# EAGLE board io_board_multi (EAGLE 7.2.0)
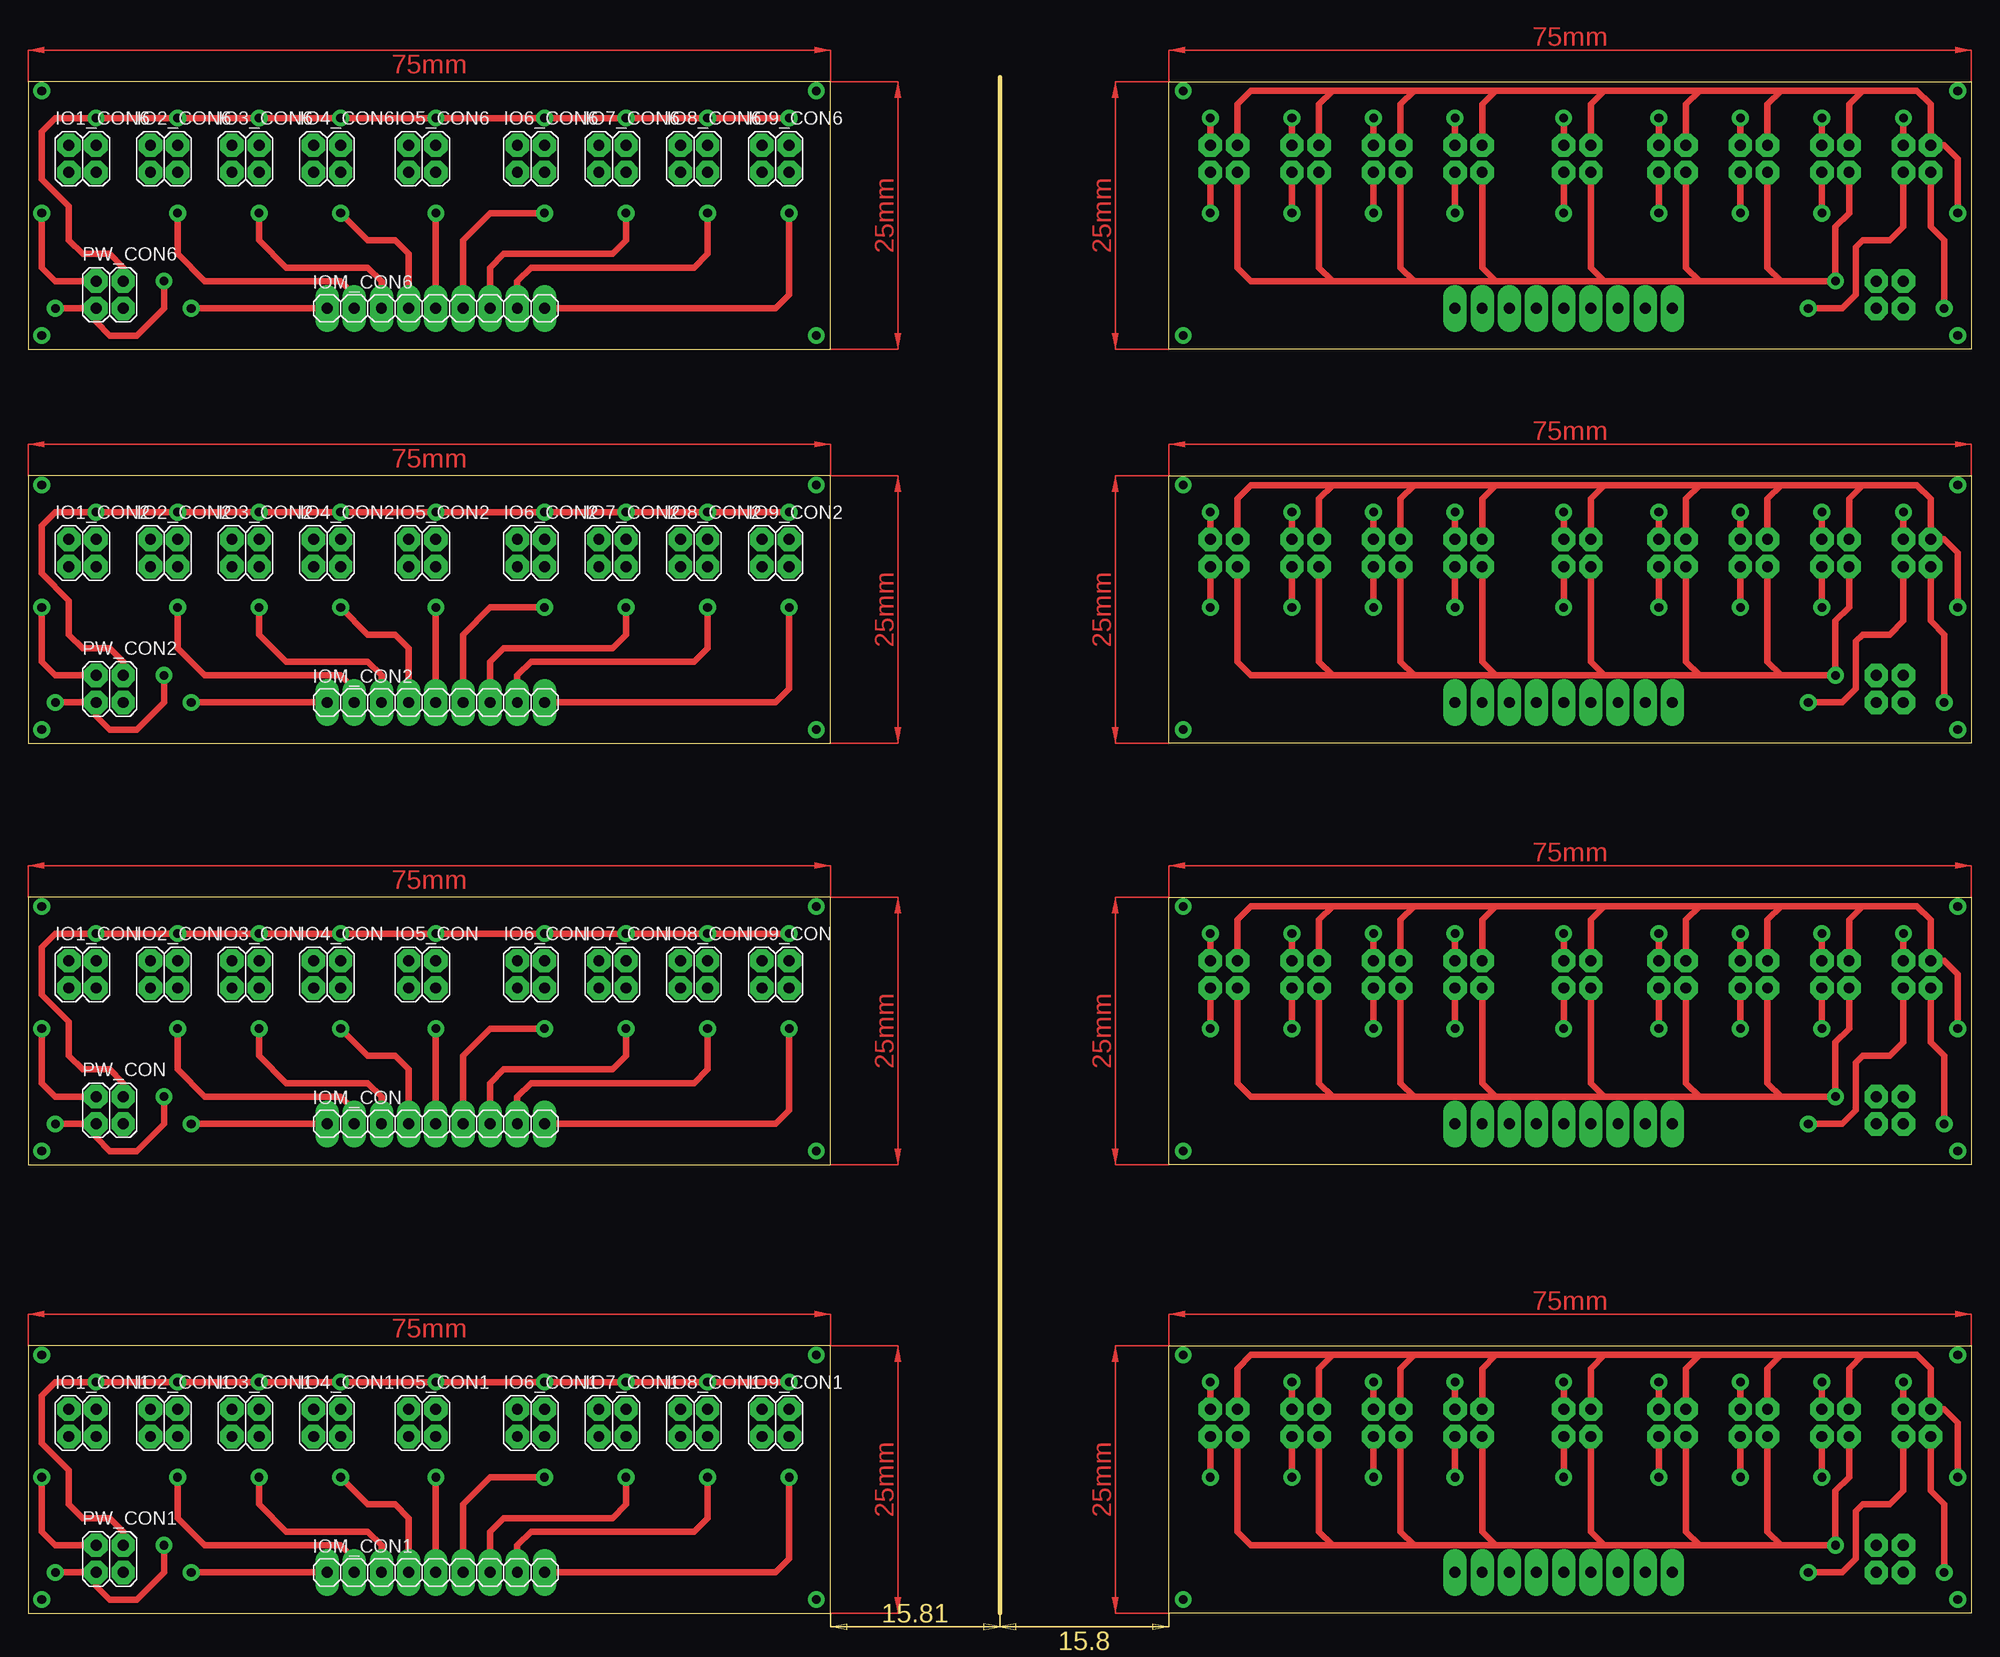
[diagram p0: board, top side]
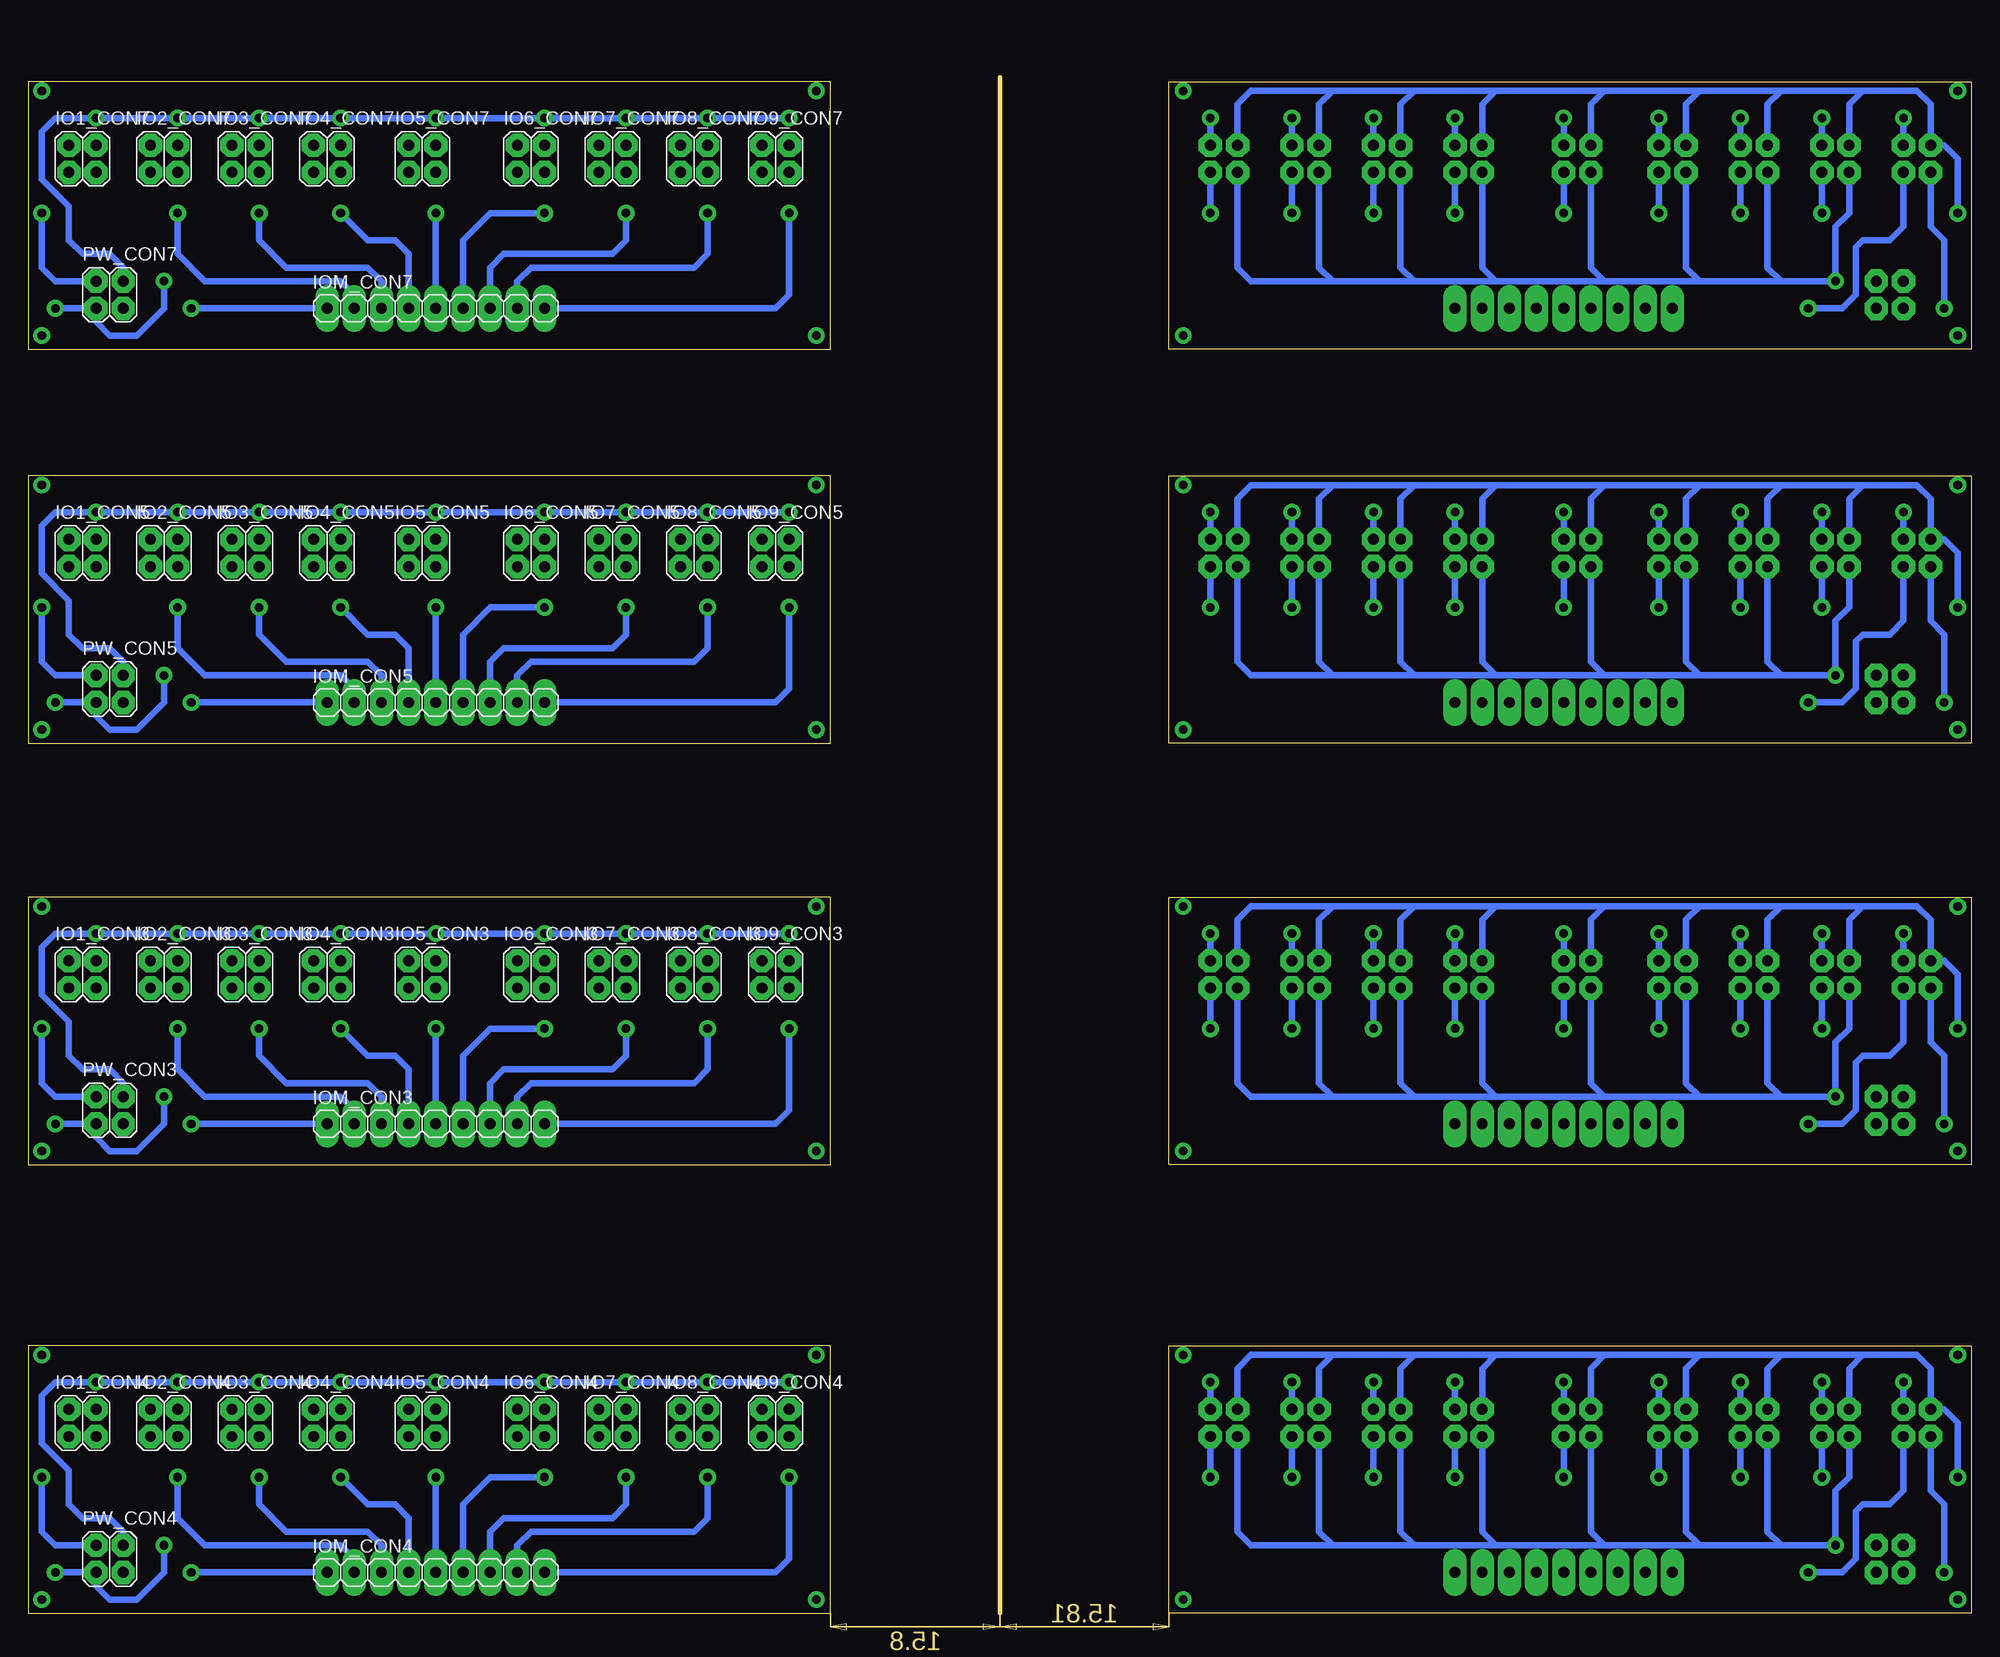
[diagram p1: board, bottom side, seen from below]

Size 181.61 x 143.51 mm. Coordinates in mm from the lower left corner, seen from the top.
Outline: 90.81,143.51 90.81,0
Outline: 0,41.91 75,41.91 75,66.91 0,66.91 0,41.91
Outline: 0,0 75,0 75,25 0,25 0,0
Outline: 0,81.28 75,81.28 75,106.28 0,106.28 0,81.28
Outline: 181.61,41.91 106.61,41.91 106.61,66.91 181.61,66.91 181.61,41.91
Outline: 181.61,0 106.61,0 106.61,25 181.61,25 181.61,0
Outline: 181.61,81.28 106.61,81.28 106.61,106.28 181.61,106.28 181.61,81.28
Outline: 0,118.11 75,118.11 75,143.11 0,143.11 0,118.11
Outline: 181.61,118.11 106.61,118.11 106.61,143.11 181.61,143.11 181.61,118.11
Copper layers (1*16): Top 0.035mm / dielectric 1.5mm / Bottom 0.035mm
Design rules "design-rules *": minimum track width 10mil, minimum drill 24mil, track to track 8mil, track to pad 8mil, pad to pad 8mil, via to via 8mil, smd to smd 8mil, copper to edge 40mil, drill to drill 8mil, minimum pad ring 23mil, minimum via ring 15mil, stop-mask expansion 4mil, vias tented up to drill 0mil, thermal gap 10mil

## Footprints (pad centres in the part's own frame; a part is rotated, then mirrored left to right if it is on the bottom)
2X02 = drill 1.016 octagon: 1 -1.27,-1.27; 2 -1.27,1.27; 3 1.27,-1.27; 4 1.27,1.27
1X09 = drill 1.016 long: 1 -10.16,0; 2 -7.62,0; 3 -5.08,0; 4 -2.54,0; 5 0,0; 6 2.54,0; 7 5.08,0; 8 7.62,0; 9 10.16,0

## Placement (x,y rotation side)
IO1_CON  [2X02]  5.08,59.69 0 top
IO1_CON1  [2X02]  5.08,17.78 0 top
IO1_CON2  [2X02]  5.08,99.06 0 top
IO1_CON3  [2X02]  176.53,59.69 0 bottom
IO1_CON4  [2X02]  176.53,17.78 0 bottom
IO1_CON5  [2X02]  176.53,99.06 0 bottom
IO1_CON6  [2X02]  5.08,135.89 0 top
IO1_CON7  [2X02]  176.53,135.89 0 bottom
IO2_CON  [2X02]  12.7,59.69 0 top
IO2_CON1  [2X02]  12.7,17.78 0 top
IO2_CON2  [2X02]  12.7,99.06 0 top
IO2_CON3  [2X02]  168.91,59.69 0 bottom
IO2_CON4  [2X02]  168.91,17.78 0 bottom
IO2_CON5  [2X02]  168.91,99.06 0 bottom
IO2_CON6  [2X02]  12.7,135.89 0 top
IO2_CON7  [2X02]  168.91,135.89 0 bottom
IO3_CON  [2X02]  20.32,59.69 0 top
IO3_CON1  [2X02]  20.32,17.78 0 top
IO3_CON2  [2X02]  20.32,99.06 0 top
IO3_CON3  [2X02]  161.29,59.69 0 bottom
IO3_CON4  [2X02]  161.29,17.78 0 bottom
IO3_CON5  [2X02]  161.29,99.06 0 bottom
IO3_CON6  [2X02]  20.32,135.89 0 top
IO3_CON7  [2X02]  161.29,135.89 0 bottom
IO4_CON  [2X02]  27.94,59.69 0 top
IO4_CON1  [2X02]  27.94,17.78 0 top
IO4_CON2  [2X02]  27.94,99.06 0 top
IO4_CON3  [2X02]  153.67,59.69 0 bottom
IO4_CON4  [2X02]  153.67,17.78 0 bottom
IO4_CON5  [2X02]  153.67,99.06 0 bottom
IO4_CON6  [2X02]  27.94,135.89 0 top
IO4_CON7  [2X02]  153.67,135.89 0 bottom
IO5_CON  [2X02]  36.83,59.69 0 top
IO5_CON1  [2X02]  36.83,17.78 0 top
IO5_CON2  [2X02]  36.83,99.06 0 top
IO5_CON3  [2X02]  144.78,59.69 0 bottom
IO5_CON4  [2X02]  144.78,17.78 0 bottom
IO5_CON5  [2X02]  144.78,99.06 0 bottom
IO5_CON6  [2X02]  36.83,135.89 0 top
IO5_CON7  [2X02]  144.78,135.89 0 bottom
IO6_CON  [2X02]  46.99,59.69 0 top
IO6_CON1  [2X02]  46.99,17.78 0 top
IO6_CON2  [2X02]  46.99,99.06 0 top
IO6_CON3  [2X02]  134.62,59.69 0 bottom
IO6_CON4  [2X02]  134.62,17.78 0 bottom
IO6_CON5  [2X02]  134.62,99.06 0 bottom
IO6_CON6  [2X02]  46.99,135.89 0 top
IO6_CON7  [2X02]  134.62,135.89 0 bottom
IO7_CON  [2X02]  54.61,59.69 0 top
IO7_CON1  [2X02]  54.61,17.78 0 top
IO7_CON2  [2X02]  54.61,99.06 0 top
IO7_CON3  [2X02]  127,59.69 0 bottom
IO7_CON4  [2X02]  127,17.78 0 bottom
IO7_CON5  [2X02]  127,99.06 0 bottom
IO7_CON6  [2X02]  54.61,135.89 0 top
IO7_CON7  [2X02]  127,135.89 0 bottom
IO8_CON  [2X02]  62.23,59.69 0 top
IO8_CON1  [2X02]  62.23,17.78 0 top
IO8_CON2  [2X02]  62.23,99.06 0 top
IO8_CON3  [2X02]  119.38,59.69 0 bottom
IO8_CON4  [2X02]  119.38,17.78 0 bottom
IO8_CON5  [2X02]  119.38,99.06 0 bottom
IO8_CON6  [2X02]  62.23,135.89 0 top
IO8_CON7  [2X02]  119.38,135.89 0 bottom
IO9_CON  [2X02]  69.85,59.69 0 top
IO9_CON1  [2X02]  69.85,17.78 0 top
IO9_CON2  [2X02]  69.85,99.06 0 top
IO9_CON3  [2X02]  111.76,59.69 0 bottom
IO9_CON4  [2X02]  111.76,17.78 0 bottom
IO9_CON5  [2X02]  111.76,99.06 0 bottom
IO9_CON6  [2X02]  69.85,135.89 0 top
IO9_CON7  [2X02]  111.76,135.89 0 bottom
IOM_CON  [1X09]  38.1,45.72 0 top
IOM_CON1  [1X09]  38.1,3.81 0 top
IOM_CON2  [1X09]  38.1,85.09 0 top
IOM_CON3  [1X09]  143.51,45.72 0 bottom
IOM_CON4  [1X09]  143.51,3.81 0 bottom
IOM_CON5  [1X09]  143.51,85.09 0 bottom
IOM_CON6  [1X09]  38.1,121.92 0 top
IOM_CON7  [1X09]  143.51,121.92 0 bottom
PW_CON  [2X02]  7.62,46.99 0 top
PW_CON1  [2X02]  7.62,5.08 0 top
PW_CON2  [2X02]  7.62,86.36 0 top
PW_CON3  [2X02]  173.99,46.99 0 bottom
PW_CON4  [2X02]  173.99,5.08 0 bottom
PW_CON5  [2X02]  173.99,86.36 0 bottom
PW_CON6  [2X02]  7.62,123.19 0 top
PW_CON7  [2X02]  173.99,123.19 0 bottom

## Library data of the parts
IO1_CON IO1_CON1-IO1_CON7 IO2_CON IO2_CON1-IO2_CON7 IO3_CON IO3_CON1-IO3_CON7 IO4_CON IO4_CON1-IO4_CON7 IO5_CON IO5_CON1-IO5_CON7 IO6_CON IO6_CON1-IO6_CON7 IO7_CON IO7_CON1-IO7_CON7 IO8_CON IO8_CON1-IO8_CON7 IO9_CON IO9_CON1-IO9_CON7 IOM_CON IOM_CON1-IOM_CON7 PW_CON PW_CON1-PW_CON7 = pinhead

## Nets
+3V1: IO1_CON1.2 IO2_CON1.2 IO3_CON1.2 IO4_CON1.2 IO5_CON1.2 IO6_CON1.2 IO7_CON1.2 IO8_CON1.2 IO9_CON1.2 PW_CON1.2
+3V2: IO1_CON2.2 IO2_CON2.2 IO3_CON2.2 IO4_CON2.2 IO5_CON2.2 IO6_CON2.2 IO7_CON2.2 IO8_CON2.2 IO9_CON2.2 PW_CON2.2
+3V3: IO1_CON.2 IO2_CON.2 IO3_CON.2 IO4_CON.2 IO5_CON.2 IO6_CON.2 IO7_CON.2 IO8_CON.2 IO9_CON.2 PW_CON.2
+3V4: IO1_CON3.2 IO2_CON3.2 IO3_CON3.2 IO4_CON3.2 IO5_CON3.2 IO6_CON3.2 IO7_CON3.2 IO8_CON3.2 IO9_CON3.2 PW_CON3.2
+3V5: IO1_CON4.2 IO2_CON4.2 IO3_CON4.2 IO4_CON4.2 IO5_CON4.2 IO6_CON4.2 IO7_CON4.2 IO8_CON4.2 IO9_CON4.2 PW_CON4.2
+3V6: IO1_CON5.2 IO2_CON5.2 IO3_CON5.2 IO4_CON5.2 IO5_CON5.2 IO6_CON5.2 IO7_CON5.2 IO8_CON5.2 IO9_CON5.2 PW_CON5.2
+3V7: IO1_CON6.2 IO2_CON6.2 IO3_CON6.2 IO4_CON6.2 IO5_CON6.2 IO6_CON6.2 IO7_CON6.2 IO8_CON6.2 IO9_CON6.2 PW_CON6.2
+3V8: IO1_CON7.2 IO2_CON7.2 IO3_CON7.2 IO4_CON7.2 IO5_CON7.2 IO6_CON7.2 IO7_CON7.2 IO8_CON7.2 IO9_CON7.2 PW_CON7.2
+5V: IO1_CON.1 IO2_CON.1 IO3_CON.1 IO4_CON.1 IO5_CON.1 IO6_CON.1 IO7_CON.1 IO8_CON.1 IO9_CON.1 PW_CON.1
+5V1: IO1_CON1.1 IO2_CON1.1 IO3_CON1.1 IO4_CON1.1 IO5_CON1.1 IO6_CON1.1 IO7_CON1.1 IO8_CON1.1 IO9_CON1.1 PW_CON1.1
+5V2: IO1_CON2.1 IO2_CON2.1 IO3_CON2.1 IO4_CON2.1 IO5_CON2.1 IO6_CON2.1 IO7_CON2.1 IO8_CON2.1 IO9_CON2.1 PW_CON2.1
+5V3: IO1_CON3.1 IO2_CON3.1 IO3_CON3.1 IO4_CON3.1 IO5_CON3.1 IO6_CON3.1 IO7_CON3.1 IO8_CON3.1 IO9_CON3.1 PW_CON3.1
+5V4: IO1_CON4.1 IO2_CON4.1 IO3_CON4.1 IO4_CON4.1 IO5_CON4.1 IO6_CON4.1 IO7_CON4.1 IO8_CON4.1 IO9_CON4.1 PW_CON4.1
+5V5: IO1_CON5.1 IO2_CON5.1 IO3_CON5.1 IO4_CON5.1 IO5_CON5.1 IO6_CON5.1 IO7_CON5.1 IO8_CON5.1 IO9_CON5.1 PW_CON5.1
+5V6: IO1_CON6.1 IO2_CON6.1 IO3_CON6.1 IO4_CON6.1 IO5_CON6.1 IO6_CON6.1 IO7_CON6.1 IO8_CON6.1 IO9_CON6.1 PW_CON6.1
+5V7: IO1_CON7.1 IO2_CON7.1 IO3_CON7.1 IO4_CON7.1 IO5_CON7.1 IO6_CON7.1 IO7_CON7.1 IO8_CON7.1 IO9_CON7.1 PW_CON7.1
GND: IO1_CON.4 IO2_CON.4 IO3_CON.4 IO4_CON.4 IO5_CON.4 IO6_CON.4 IO7_CON.4 IO8_CON.4 IO9_CON.4 PW_CON.4
GND1: IO1_CON1.4 IO2_CON1.4 IO3_CON1.4 IO4_CON1.4 IO5_CON1.4 IO6_CON1.4 IO7_CON1.4 IO8_CON1.4 IO9_CON1.4 PW_CON1.4
GND2: IO1_CON2.4 IO2_CON2.4 IO3_CON2.4 IO4_CON2.4 IO5_CON2.4 IO6_CON2.4 IO7_CON2.4 IO8_CON2.4 IO9_CON2.4 PW_CON2.4
GND3: IO1_CON3.4 IO2_CON3.4 IO3_CON3.4 IO4_CON3.4 IO5_CON3.4 IO6_CON3.4 IO7_CON3.4 IO8_CON3.4 IO9_CON3.4 PW_CON3.4
GND4: IO1_CON4.4 IO2_CON4.4 IO3_CON4.4 IO4_CON4.4 IO5_CON4.4 IO6_CON4.4 IO7_CON4.4 IO8_CON4.4 IO9_CON4.4 PW_CON4.4
GND5: IO1_CON5.4 IO2_CON5.4 IO3_CON5.4 IO4_CON5.4 IO5_CON5.4 IO6_CON5.4 IO7_CON5.4 IO8_CON5.4 IO9_CON5.4 PW_CON5.4
GND6: IO1_CON6.4 IO2_CON6.4 IO3_CON6.4 IO4_CON6.4 IO5_CON6.4 IO6_CON6.4 IO7_CON6.4 IO8_CON6.4 IO9_CON6.4 PW_CON6.4
GND7: IO1_CON7.4 IO2_CON7.4 IO3_CON7.4 IO4_CON7.4 IO5_CON7.4 IO6_CON7.4 IO7_CON7.4 IO8_CON7.4 IO9_CON7.4 PW_CON7.4
IO0: IO1_CON.3 IOM_CON.1
IO1: IO2_CON.3 IOM_CON.2
IO2: IO3_CON.3 IOM_CON.3
IO3: IO4_CON.3 IOM_CON.4
IO4: IO5_CON.3 IOM_CON.5
IO5: IO6_CON.3 IOM_CON.6
IO6: IO7_CON.3 IOM_CON.7
IO7: IO8_CON.3 IOM_CON.8
IO8: IO9_CON.3 IOM_CON.9
IO9: IO8_CON1.3 IOM_CON1.8
IO10: IO7_CON1.3 IOM_CON1.7
IO11: IO6_CON1.3 IOM_CON1.6
IO12: IO5_CON1.3 IOM_CON1.5
IO13: IO4_CON1.3 IOM_CON1.4
IO14: IO3_CON1.3 IOM_CON1.3
IO15: IO2_CON1.3 IOM_CON1.2
IO16: IO1_CON1.3 IOM_CON1.1
IO17: IO9_CON1.3 IOM_CON1.9
IO18: IO8_CON2.3 IOM_CON2.8
IO19: IO7_CON2.3 IOM_CON2.7
IO20: IO6_CON2.3 IOM_CON2.6
IO21: IO5_CON2.3 IOM_CON2.5
IO22: IO4_CON2.3 IOM_CON2.4
IO23: IO3_CON2.3 IOM_CON2.3
IO24: IO2_CON2.3 IOM_CON2.2
IO25: IO1_CON2.3 IOM_CON2.1
IO26: IO9_CON2.3 IOM_CON2.9
IO27: IO8_CON3.3 IOM_CON3.8
IO28: IO7_CON3.3 IOM_CON3.7
IO29: IO6_CON3.3 IOM_CON3.6
IO30: IO5_CON3.3 IOM_CON3.5
IO31: IO4_CON3.3 IOM_CON3.4
IO32: IO3_CON3.3 IOM_CON3.3
IO33: IO2_CON3.3 IOM_CON3.2
IO34: IO1_CON3.3 IOM_CON3.1
IO35: IO9_CON3.3 IOM_CON3.9
IO36: IO8_CON4.3 IOM_CON4.8
IO37: IO7_CON4.3 IOM_CON4.7
IO38: IO6_CON4.3 IOM_CON4.6
IO39: IO5_CON4.3 IOM_CON4.5
IO40: IO4_CON4.3 IOM_CON4.4
IO41: IO3_CON4.3 IOM_CON4.3
IO42: IO2_CON4.3 IOM_CON4.2
IO43: IO1_CON4.3 IOM_CON4.1
IO44: IO9_CON4.3 IOM_CON4.9
IO45: IO8_CON5.3 IOM_CON5.8
IO46: IO7_CON5.3 IOM_CON5.7
IO47: IO6_CON5.3 IOM_CON5.6
IO48: IO5_CON5.3 IOM_CON5.5
IO49: IO4_CON5.3 IOM_CON5.4
IO50: IO3_CON5.3 IOM_CON5.3
IO51: IO2_CON5.3 IOM_CON5.2
IO52: IO1_CON5.3 IOM_CON5.1
IO53: IO9_CON5.3 IOM_CON5.9
IO54: IO8_CON6.3 IOM_CON6.8
IO55: IO7_CON6.3 IOM_CON6.7
IO56: IO6_CON6.3 IOM_CON6.6
IO57: IO5_CON6.3 IOM_CON6.5
IO58: IO4_CON6.3 IOM_CON6.4
IO59: IO3_CON6.3 IOM_CON6.3
IO60: IO2_CON6.3 IOM_CON6.2
IO61: IO1_CON6.3 IOM_CON6.1
IO62: IO9_CON6.3 IOM_CON6.9
IO63: IO8_CON7.3 IOM_CON7.8
IO64: IO7_CON7.3 IOM_CON7.7
IO65: IO6_CON7.3 IOM_CON7.6
IO66: IO5_CON7.3 IOM_CON7.5
IO67: IO4_CON7.3 IOM_CON7.4
IO68: IO3_CON7.3 IOM_CON7.3
IO69: IO2_CON7.3 IOM_CON7.2
IO70: IO1_CON7.3 IOM_CON7.1
IO71: IO9_CON7.3 IOM_CON7.9

## Tracks (layer width: path | path; a pad name or v marks a point on that pad's centre or on a via)
+3V1  (via drill 0.8)
  Top 0.61: PW_CON1.2 2.54,6.35 1.27,7.62 v1.27,12.7
  Bottom 0.61: v1.27,12.7 1.27,17.78 2.54,19.05 IO1_CON1.2 3.81,22.86 5.08,24.13 10.16,24.13 | 10.16,24.13 11.43,22.86 IO2_CON1.2 | IO3_CON1.2 19.05,22.86 17.78,24.13 | 17.78,24.13 10.16,24.13 | IO4_CON1.2 26.67,22.86 25.4,24.13 | 25.4,24.13 17.78,24.13 | IO5_CON1.2 35.56,22.86 34.29,24.13 | 34.29,24.13 25.4,24.13 | IO6_CON1.2 45.72,22.86 44.45,24.13 | 44.45,24.13 34.29,24.13 | IO7_CON1.2 53.34,22.86 52.07,24.13 | 52.07,24.13 44.45,24.13 | IO8_CON1.2 60.96,22.86 59.69,24.13 | 59.69,24.13 52.07,24.13 | IO9_CON1.2 68.58,22.86 67.31,24.13 59.69,24.13
+3V2  (via drill 0.8)
  Top 0.61: PW_CON2.2 2.54,87.63 1.27,88.9 v1.27,93.98
  Bottom 0.61: v1.27,93.98 1.27,99.06 2.54,100.33 IO1_CON2.2 3.81,104.14 5.08,105.41 10.16,105.41 | 10.16,105.41 11.43,104.14 IO2_CON2.2 | IO3_CON2.2 19.05,104.14 17.78,105.41 | 17.78,105.41 10.16,105.41 | IO4_CON2.2 26.67,104.14 25.4,105.41 | 25.4,105.41 17.78,105.41 | IO5_CON2.2 35.56,104.14 34.29,105.41 | 34.29,105.41 25.4,105.41 | IO6_CON2.2 45.72,104.14 44.45,105.41 | 44.45,105.41 34.29,105.41 | IO7_CON2.2 53.34,104.14 52.07,105.41 | 52.07,105.41 44.45,105.41 | IO8_CON2.2 60.96,104.14 59.69,105.41 | 59.69,105.41 52.07,105.41 | IO9_CON2.2 68.58,104.14 67.31,105.41 59.69,105.41
+3V3  (via drill 0.8)
  Top 0.61: PW_CON.2 2.54,48.26 1.27,49.53 v1.27,54.61
  Bottom 0.61: v1.27,54.61 1.27,59.69 2.54,60.96 IO1_CON.2 3.81,64.77 5.08,66.04 10.16,66.04 | 10.16,66.04 11.43,64.77 IO2_CON.2 | IO3_CON.2 19.05,64.77 17.78,66.04 | 17.78,66.04 10.16,66.04 | IO4_CON.2 26.67,64.77 25.4,66.04 | 25.4,66.04 17.78,66.04 | IO5_CON.2 35.56,64.77 34.29,66.04 | 34.29,66.04 25.4,66.04 | IO6_CON.2 45.72,64.77 44.45,66.04 | 44.45,66.04 34.29,66.04 | IO7_CON.2 53.34,64.77 52.07,66.04 | 52.07,66.04 44.45,66.04 | IO8_CON.2 60.96,64.77 59.69,66.04 | 59.69,66.04 52.07,66.04 | IO9_CON.2 68.58,64.77 67.31,66.04 59.69,66.04
+3V4  (via drill 0.8)
  Top 0.61: v180.34,54.61 180.34,59.69 179.07,60.96 IO1_CON3.2 177.8,64.77 176.53,66.04 171.45,66.04 | 171.45,66.04 170.18,64.77 IO2_CON3.2 | IO3_CON3.2 162.56,64.77 163.83,66.04 | 163.83,66.04 171.45,66.04 | IO4_CON3.2 154.94,64.77 156.21,66.04 | 156.21,66.04 163.83,66.04 | IO5_CON3.2 146.05,64.77 147.32,66.04 | 147.32,66.04 156.21,66.04 | IO6_CON3.2 135.89,64.77 137.16,66.04 | 137.16,66.04 147.32,66.04 | IO7_CON3.2 128.27,64.77 129.54,66.04 | 129.54,66.04 137.16,66.04 | IO8_CON3.2 120.65,64.77 121.92,66.04 | 121.92,66.04 129.54,66.04 | IO9_CON3.2 113.03,64.77 114.3,66.04 121.92,66.04
  Bottom 0.61: PW_CON3.2 179.07,48.26 180.34,49.53 v180.34,54.61
+3V5  (via drill 0.8)
  Top 0.61: v180.34,12.7 180.34,17.78 179.07,19.05 IO1_CON4.2 177.8,22.86 176.53,24.13 171.45,24.13 | 171.45,24.13 170.18,22.86 IO2_CON4.2 | IO3_CON4.2 162.56,22.86 163.83,24.13 | 163.83,24.13 171.45,24.13 | IO4_CON4.2 154.94,22.86 156.21,24.13 | 156.21,24.13 163.83,24.13 | IO5_CON4.2 146.05,22.86 147.32,24.13 | 147.32,24.13 156.21,24.13 | IO6_CON4.2 135.89,22.86 137.16,24.13 | 137.16,24.13 147.32,24.13 | IO7_CON4.2 128.27,22.86 129.54,24.13 | 129.54,24.13 137.16,24.13 | IO8_CON4.2 120.65,22.86 121.92,24.13 | 121.92,24.13 129.54,24.13 | IO9_CON4.2 113.03,22.86 114.3,24.13 121.92,24.13
  Bottom 0.61: PW_CON4.2 179.07,6.35 180.34,7.62 v180.34,12.7
+3V6  (via drill 0.8)
  Top 0.61: v180.34,93.98 180.34,99.06 179.07,100.33 IO1_CON5.2 177.8,104.14 176.53,105.41 171.45,105.41 | 171.45,105.41 170.18,104.14 IO2_CON5.2 | IO3_CON5.2 162.56,104.14 163.83,105.41 | 163.83,105.41 171.45,105.41 | IO4_CON5.2 154.94,104.14 156.21,105.41 | 156.21,105.41 163.83,105.41 | IO5_CON5.2 146.05,104.14 147.32,105.41 | 147.32,105.41 156.21,105.41 | IO6_CON5.2 135.89,104.14 137.16,105.41 | 137.16,105.41 147.32,105.41 | IO7_CON5.2 128.27,104.14 129.54,105.41 | 129.54,105.41 137.16,105.41 | IO8_CON5.2 120.65,104.14 121.92,105.41 | 121.92,105.41 129.54,105.41 | IO9_CON5.2 113.03,104.14 114.3,105.41 121.92,105.41
  Bottom 0.61: PW_CON5.2 179.07,87.63 180.34,88.9 v180.34,93.98
+3V7  (via drill 0.8)
  Top 0.61: PW_CON6.2 2.54,124.46 1.27,125.73 v1.27,130.81
  Bottom 0.61: v1.27,130.81 1.27,135.89 2.54,137.16 IO1_CON6.2 3.81,140.97 5.08,142.24 10.16,142.24 | 10.16,142.24 11.43,140.97 IO2_CON6.2 | IO3_CON6.2 19.05,140.97 17.78,142.24 | 17.78,142.24 10.16,142.24 | IO4_CON6.2 26.67,140.97 25.4,142.24 | 25.4,142.24 17.78,142.24 | IO5_CON6.2 35.56,140.97 34.29,142.24 | 34.29,142.24 25.4,142.24 | IO6_CON6.2 45.72,140.97 44.45,142.24 | 44.45,142.24 34.29,142.24 | IO7_CON6.2 53.34,140.97 52.07,142.24 | 52.07,142.24 44.45,142.24 | IO8_CON6.2 60.96,140.97 59.69,142.24 | 59.69,142.24 52.07,142.24 | IO9_CON6.2 68.58,140.97 67.31,142.24 59.69,142.24
+3V8  (via drill 0.8)
  Top 0.61: v180.34,130.81 180.34,135.89 179.07,137.16 IO1_CON7.2 177.8,140.97 176.53,142.24 171.45,142.24 | 171.45,142.24 170.18,140.97 IO2_CON7.2 | IO3_CON7.2 162.56,140.97 163.83,142.24 | 163.83,142.24 171.45,142.24 | IO4_CON7.2 154.94,140.97 156.21,142.24 | 156.21,142.24 163.83,142.24 | IO5_CON7.2 146.05,140.97 147.32,142.24 | 147.32,142.24 156.21,142.24 | IO6_CON7.2 135.89,140.97 137.16,142.24 | 137.16,142.24 147.32,142.24 | IO7_CON7.2 128.27,140.97 129.54,142.24 | 129.54,142.24 137.16,142.24 | IO8_CON7.2 120.65,140.97 121.92,142.24 | 121.92,142.24 129.54,142.24 | IO9_CON7.2 113.03,140.97 114.3,142.24 121.92,142.24
  Bottom 0.61: PW_CON7.2 179.07,124.46 180.34,125.73 v180.34,130.81
+5V  (via drill 0.8)
  Top 0.61: v12.7,48.26 12.7,45.72 10.16,43.18 7.62,43.18 6.35,44.45 PW_CON.1 v2.54,45.72
  Bottom 0.61: IO4_CON.1 26.67,49.53 25.4,48.26 | 25.4,48.26 17.78,48.26 | 17.78,48.26 v12.7,48.26 12.7,53.34 11.43,54.61 IO2_CON.1 | IO3_CON.1 19.05,49.53 17.78,48.26 | IO5_CON.1 35.56,49.53 34.29,48.26 | 34.29,48.26 25.4,48.26 | IO6_CON.1 45.72,49.53 44.45,48.26 | 44.45,48.26 34.29,48.26 | IO7_CON.1 53.34,49.53 52.07,48.26 | 52.07,48.26 44.45,48.26 | IO8_CON.1 60.96,49.53 59.69,48.26 | 59.69,48.26 52.07,48.26 | IO9_CON.1 68.58,49.53 67.31,48.26 59.69,48.26 | IO1_CON.1 3.81,53.34 2.54,52.07 v2.54,45.72
+5V1  (via drill 0.8)
  Top 0.61: v12.7,6.35 12.7,3.81 10.16,1.27 7.62,1.27 6.35,2.54 PW_CON1.1 v2.54,3.81
  Bottom 0.61: IO4_CON1.1 26.67,7.62 25.4,6.35 | 25.4,6.35 17.78,6.35 | 17.78,6.35 v12.7,6.35 12.7,11.43 11.43,12.7 IO2_CON1.1 | IO3_CON1.1 19.05,7.62 17.78,6.35 | IO5_CON1.1 35.56,7.62 34.29,6.35 | 34.29,6.35 25.4,6.35 | IO6_CON1.1 45.72,7.62 44.45,6.35 | 44.45,6.35 34.29,6.35 | IO7_CON1.1 53.34,7.62 52.07,6.35 | 52.07,6.35 44.45,6.35 | IO8_CON1.1 60.96,7.62 59.69,6.35 | 59.69,6.35 52.07,6.35 | IO9_CON1.1 68.58,7.62 67.31,6.35 59.69,6.35 | IO1_CON1.1 3.81,11.43 2.54,10.16 v2.54,3.81
+5V2  (via drill 0.8)
  Top 0.61: v12.7,87.63 12.7,85.09 10.16,82.55 7.62,82.55 6.35,83.82 PW_CON2.1 v2.54,85.09
  Bottom 0.61: IO4_CON2.1 26.67,88.9 25.4,87.63 | 25.4,87.63 17.78,87.63 | 17.78,87.63 v12.7,87.63 12.7,92.71 11.43,93.98 IO2_CON2.1 | IO3_CON2.1 19.05,88.9 17.78,87.63 | IO5_CON2.1 35.56,88.9 34.29,87.63 | 34.29,87.63 25.4,87.63 | IO6_CON2.1 45.72,88.9 44.45,87.63 | 44.45,87.63 34.29,87.63 | IO7_CON2.1 53.34,88.9 52.07,87.63 | 52.07,87.63 44.45,87.63 | IO8_CON2.1 60.96,88.9 59.69,87.63 | 59.69,87.63 52.07,87.63 | IO9_CON2.1 68.58,88.9 67.31,87.63 59.69,87.63 | IO1_CON2.1 3.81,92.71 2.54,91.44 v2.54,85.09
+5V3  (via drill 0.8)
  Top 0.61: IO4_CON3.1 154.94,49.53 156.21,48.26 | 156.21,48.26 163.83,48.26 | 163.83,48.26 v168.91,48.26 168.91,53.34 170.18,54.61 IO2_CON3.1 | IO3_CON3.1 162.56,49.53 163.83,48.26 | IO5_CON3.1 146.05,49.53 147.32,48.26 | 147.32,48.26 156.21,48.26 | IO6_CON3.1 135.89,49.53 137.16,48.26 | 137.16,48.26 147.32,48.26 | IO7_CON3.1 128.27,49.53 129.54,48.26 | 129.54,48.26 137.16,48.26 | IO8_CON3.1 120.65,49.53 121.92,48.26 | 121.92,48.26 129.54,48.26 | IO9_CON3.1 113.03,49.53 114.3,48.26 121.92,48.26 | IO1_CON3.1 177.8,53.34 179.07,52.07 v179.07,45.72
  Bottom 0.61: v168.91,48.26 168.91,45.72 171.45,43.18 173.99,43.18 175.26,44.45 PW_CON3.1 v179.07,45.72
+5V4  (via drill 0.8)
  Top 0.61: IO4_CON4.1 154.94,7.62 156.21,6.35 | 156.21,6.35 163.83,6.35 | 163.83,6.35 v168.91,6.35 168.91,11.43 170.18,12.7 IO2_CON4.1 | IO3_CON4.1 162.56,7.62 163.83,6.35 | IO5_CON4.1 146.05,7.62 147.32,6.35 | 147.32,6.35 156.21,6.35 | IO6_CON4.1 135.89,7.62 137.16,6.35 | 137.16,6.35 147.32,6.35 | IO7_CON4.1 128.27,7.62 129.54,6.35 | 129.54,6.35 137.16,6.35 | IO8_CON4.1 120.65,7.62 121.92,6.35 | 121.92,6.35 129.54,6.35 | IO9_CON4.1 113.03,7.62 114.3,6.35 121.92,6.35 | IO1_CON4.1 177.8,11.43 179.07,10.16 v179.07,3.81
  Bottom 0.61: v168.91,6.35 168.91,3.81 171.45,1.27 173.99,1.27 175.26,2.54 PW_CON4.1 v179.07,3.81
+5V5  (via drill 0.8)
  Top 0.61: IO4_CON5.1 154.94,88.9 156.21,87.63 | 156.21,87.63 163.83,87.63 | 163.83,87.63 v168.91,87.63 168.91,92.71 170.18,93.98 IO2_CON5.1 | IO3_CON5.1 162.56,88.9 163.83,87.63 | IO5_CON5.1 146.05,88.9 147.32,87.63 | 147.32,87.63 156.21,87.63 | IO6_CON5.1 135.89,88.9 137.16,87.63 | 137.16,87.63 147.32,87.63 | IO7_CON5.1 128.27,88.9 129.54,87.63 | 129.54,87.63 137.16,87.63 | IO8_CON5.1 120.65,88.9 121.92,87.63 | 121.92,87.63 129.54,87.63 | IO9_CON5.1 113.03,88.9 114.3,87.63 121.92,87.63 | IO1_CON5.1 177.8,92.71 179.07,91.44 v179.07,85.09
  Bottom 0.61: v168.91,87.63 168.91,85.09 171.45,82.55 173.99,82.55 175.26,83.82 PW_CON5.1 v179.07,85.09
+5V6  (via drill 0.8)
  Top 0.61: v12.7,124.46 12.7,121.92 10.16,119.38 7.62,119.38 6.35,120.65 PW_CON6.1 v2.54,121.92
  Bottom 0.61: IO4_CON6.1 26.67,125.73 25.4,124.46 | 25.4,124.46 17.78,124.46 | 17.78,124.46 v12.7,124.46 12.7,129.54 11.43,130.81 IO2_CON6.1 | IO3_CON6.1 19.05,125.73 17.78,124.46 | IO5_CON6.1 35.56,125.73 34.29,124.46 | 34.29,124.46 25.4,124.46 | IO6_CON6.1 45.72,125.73 44.45,124.46 | 44.45,124.46 34.29,124.46 | IO7_CON6.1 53.34,125.73 52.07,124.46 | 52.07,124.46 44.45,124.46 | IO8_CON6.1 60.96,125.73 59.69,124.46 | 59.69,124.46 52.07,124.46 | IO9_CON6.1 68.58,125.73 67.31,124.46 59.69,124.46 | IO1_CON6.1 3.81,129.54 2.54,128.27 v2.54,121.92
+5V7  (via drill 0.8)
  Top 0.61: IO4_CON7.1 154.94,125.73 156.21,124.46 | 156.21,124.46 163.83,124.46 | 163.83,124.46 v168.91,124.46 168.91,129.54 170.18,130.81 IO2_CON7.1 | IO3_CON7.1 162.56,125.73 163.83,124.46 | IO5_CON7.1 146.05,125.73 147.32,124.46 | 147.32,124.46 156.21,124.46 | IO6_CON7.1 135.89,125.73 137.16,124.46 | 137.16,124.46 147.32,124.46 | IO7_CON7.1 128.27,125.73 129.54,124.46 | 129.54,124.46 137.16,124.46 | IO8_CON7.1 120.65,125.73 121.92,124.46 | 121.92,124.46 129.54,124.46 | IO9_CON7.1 113.03,125.73 114.3,124.46 121.92,124.46 | IO1_CON7.1 177.8,129.54 179.07,128.27 v179.07,121.92
  Bottom 0.61: v168.91,124.46 168.91,121.92 171.45,119.38 173.99,119.38 175.26,120.65 PW_CON7.1 v179.07,121.92
GND  (via drill 0.8)
  Top 0.61: v71.12,63.5 v63.5,63.5 v55.88,63.5 v48.26,63.5 v38.1,63.5 v29.21,63.5 v21.59,63.5 v13.97,63.5 v6.35,63.5 2.54,63.5 1.27,62.23 1.27,57.78 3.81,55.24 3.81,52.07 5.08,50.8 7.62,50.8 8.89,49.53 PW_CON.4
  Bottom 0.61: v13.97,63.5 IO2_CON.4 | IO3_CON.4 v21.59,63.5 | IO4_CON.4 v29.21,63.5 | IO5_CON.4 v38.1,63.5 | IO6_CON.4 v48.26,63.5 | IO7_CON.4 v55.88,63.5 | IO8_CON.4 v63.5,63.5 | IO9_CON.4 v71.12,63.5 | IO1_CON.4 v6.35,63.5
GND1  (via drill 0.8)
  Top 0.61: v71.12,21.59 v63.5,21.59 v55.88,21.59 v48.26,21.59 v38.1,21.59 v29.21,21.59 v21.59,21.59 v13.97,21.59 v6.35,21.59 2.54,21.59 1.27,20.32 1.27,15.87 3.81,13.33 3.81,10.16 5.08,8.89 7.62,8.89 8.89,7.62 PW_CON1.4
  Bottom 0.61: v13.97,21.59 IO2_CON1.4 | IO3_CON1.4 v21.59,21.59 | IO4_CON1.4 v29.21,21.59 | IO5_CON1.4 v38.1,21.59 | IO6_CON1.4 v48.26,21.59 | IO7_CON1.4 v55.88,21.59 | IO8_CON1.4 v63.5,21.59 | IO9_CON1.4 v71.12,21.59 | IO1_CON1.4 v6.35,21.59
GND2  (via drill 0.8)
  Top 0.61: v71.12,102.87 v63.5,102.87 v55.88,102.87 v48.26,102.87 v38.1,102.87 v29.21,102.87 v21.59,102.87 v13.97,102.87 v6.35,102.87 2.54,102.87 1.27,101.6 1.27,97.16 3.81,94.61 3.81,91.44 5.08,90.17 7.62,90.17 8.89,88.9 PW_CON2.4
  Bottom 0.61: v13.97,102.87 IO2_CON2.4 | IO3_CON2.4 v21.59,102.87 | IO4_CON2.4 v29.21,102.87 | IO5_CON2.4 v38.1,102.87 | IO6_CON2.4 v48.26,102.87 | IO7_CON2.4 v55.88,102.87 | IO8_CON2.4 v63.5,102.87 | IO9_CON2.4 v71.12,102.87 | IO1_CON2.4 v6.35,102.87
GND3  (via drill 0.8)
  Top 0.61: v167.64,63.5 IO2_CON3.4 | IO3_CON3.4 v160.02,63.5 | IO4_CON3.4 v152.4,63.5 | IO5_CON3.4 v143.51,63.5 | IO6_CON3.4 v133.35,63.5 | IO7_CON3.4 v125.73,63.5 | IO8_CON3.4 v118.11,63.5 | IO9_CON3.4 v110.49,63.5 | IO1_CON3.4 v175.26,63.5
  Bottom 0.61: v110.49,63.5 v118.11,63.5 v125.73,63.5 v133.35,63.5 v143.51,63.5 v152.4,63.5 v160.02,63.5 v167.64,63.5 v175.26,63.5 179.07,63.5 180.34,62.23 180.34,57.78 177.8,55.24 177.8,52.07 176.53,50.8 173.99,50.8 172.72,49.53 PW_CON3.4
GND4  (via drill 0.8)
  Top 0.61: v167.64,21.59 IO2_CON4.4 | IO3_CON4.4 v160.02,21.59 | IO4_CON4.4 v152.4,21.59 | IO5_CON4.4 v143.51,21.59 | IO6_CON4.4 v133.35,21.59 | IO7_CON4.4 v125.73,21.59 | IO8_CON4.4 v118.11,21.59 | IO9_CON4.4 v110.49,21.59 | IO1_CON4.4 v175.26,21.59
  Bottom 0.61: v110.49,21.59 v118.11,21.59 v125.73,21.59 v133.35,21.59 v143.51,21.59 v152.4,21.59 v160.02,21.59 v167.64,21.59 v175.26,21.59 179.07,21.59 180.34,20.32 180.34,15.87 177.8,13.33 177.8,10.16 176.53,8.89 173.99,8.89 172.72,7.62 PW_CON4.4
GND5  (via drill 0.8)
  Top 0.61: v167.64,102.87 IO2_CON5.4 | IO3_CON5.4 v160.02,102.87 | IO4_CON5.4 v152.4,102.87 | IO5_CON5.4 v143.51,102.87 | IO6_CON5.4 v133.35,102.87 | IO7_CON5.4 v125.73,102.87 | IO8_CON5.4 v118.11,102.87 | IO9_CON5.4 v110.49,102.87 | IO1_CON5.4 v175.26,102.87
  Bottom 0.61: v110.49,102.87 v118.11,102.87 v125.73,102.87 v133.35,102.87 v143.51,102.87 v152.4,102.87 v160.02,102.87 v167.64,102.87 v175.26,102.87 179.07,102.87 180.34,101.6 180.34,97.16 177.8,94.61 177.8,91.44 176.53,90.17 173.99,90.17 172.72,88.9 PW_CON5.4
GND6  (via drill 0.8)
  Top 0.61: v71.12,139.7 v63.5,139.7 v55.88,139.7 v48.26,139.7 v38.1,139.7 v29.21,139.7 v21.59,139.7 v13.97,139.7 v6.35,139.7 2.54,139.7 1.27,138.43 1.27,133.99 3.81,131.44 3.81,128.27 5.08,127 7.62,127 8.89,125.73 PW_CON6.4
  Bottom 0.61: v13.97,139.7 IO2_CON6.4 | IO3_CON6.4 v21.59,139.7 | IO4_CON6.4 v29.21,139.7 | IO5_CON6.4 v38.1,139.7 | IO6_CON6.4 v48.26,139.7 | IO7_CON6.4 v55.88,139.7 | IO8_CON6.4 v63.5,139.7 | IO9_CON6.4 v71.12,139.7 | IO1_CON6.4 v6.35,139.7
GND7  (via drill 0.8)
  Top 0.61: v167.64,139.7 IO2_CON7.4 | IO3_CON7.4 v160.02,139.7 | IO4_CON7.4 v152.4,139.7 | IO5_CON7.4 v143.51,139.7 | IO6_CON7.4 v133.35,139.7 | IO7_CON7.4 v125.73,139.7 | IO8_CON7.4 v118.11,139.7 | IO9_CON7.4 v110.49,139.7 | IO1_CON7.4 v175.26,139.7
  Bottom 0.61: v110.49,139.7 v118.11,139.7 v125.73,139.7 v133.35,139.7 v143.51,139.7 v152.4,139.7 v160.02,139.7 v167.64,139.7 v175.26,139.7 179.07,139.7 180.34,138.43 180.34,133.99 177.8,131.44 177.8,128.27 176.53,127 173.99,127 172.72,125.73 PW_CON7.4
IO0  (via drill 0.8)
  Top 0.61: IOM_CON.1 v15.24,45.72
  Bottom 0.61: IO1_CON.3 6.35,53.34 7.62,52.07 10.16,52.07 10.79,51.43 10.79,46.99 12.07,45.72 v15.24,45.72
IO1  (via drill 0.8)
  Top 0.61: v13.97,54.61 13.97,50.8 16.51,48.26 29.21,48.26 30.48,46.99 IOM_CON.2
  Bottom 0.61: IO2_CON.3 v13.97,54.61
IO2  (via drill 0.8)
  Top 0.61: IOM_CON.3 33.02,48.26 31.75,49.53 24.13,49.53 21.59,52.07 v21.59,54.61
  Bottom 0.61: v21.59,54.61 IO3_CON.3
IO3  (via drill 0.8)
  Top 0.61: v29.21,54.61 31.75,52.07 34.29,52.07 35.56,50.8 IOM_CON.4
  Bottom 0.61: v29.21,54.61 IO4_CON.3
IO4  (via drill 0.8)
  Top 0.61: v38.1,54.61 IOM_CON.5
  Bottom 0.61: v38.1,54.61 IO5_CON.3
IO5  (via drill 0.8)
  Top 0.61: IOM_CON.6 40.64,52.07 43.18,54.61 v48.26,54.61
  Bottom 0.61: v48.26,54.61 IO6_CON.3
IO6  (via drill 0.8)
  Top 0.61: IOM_CON.7 43.18,49.53 44.45,50.8 54.61,50.8 55.88,52.07 v55.88,54.61
  Bottom 0.61: v55.88,54.61 IO7_CON.3
IO7  (via drill 0.8)
  Top 0.61: IOM_CON.8 45.72,48.26 46.99,49.53 62.23,49.53 63.5,50.8 v63.5,54.61
  Bottom 0.61: v63.5,54.61 IO8_CON.3
IO8  (via drill 0.8)
  Top 0.61: IOM_CON.9 69.85,45.72 71.12,46.99 v71.12,54.61
  Bottom 0.61: v71.12,54.61 IO9_CON.3
IO9  (via drill 0.8)
  Top 0.61: IOM_CON1.8 45.72,6.35 46.99,7.62 62.23,7.62 63.5,8.89 v63.5,12.7
  Bottom 0.61: v63.5,12.7 IO8_CON1.3
IO10  (via drill 0.8)
  Top 0.61: IOM_CON1.7 43.18,7.62 44.45,8.89 54.61,8.89 55.88,10.16 v55.88,12.7
  Bottom 0.61: v55.88,12.7 IO7_CON1.3
IO11  (via drill 0.8)
  Top 0.61: IOM_CON1.6 40.64,10.16 43.18,12.7 v48.26,12.7
  Bottom 0.61: v48.26,12.7 IO6_CON1.3
IO12  (via drill 0.8)
  Top 0.61: v38.1,12.7 IOM_CON1.5
  Bottom 0.61: v38.1,12.7 IO5_CON1.3
IO13  (via drill 0.8)
  Top 0.61: v29.21,12.7 31.75,10.16 34.29,10.16 35.56,8.89 IOM_CON1.4
  Bottom 0.61: v29.21,12.7 IO4_CON1.3
IO14  (via drill 0.8)
  Top 0.61: IOM_CON1.3 33.02,6.35 31.75,7.62 24.13,7.62 21.59,10.16 v21.59,12.7
  Bottom 0.61: v21.59,12.7 IO3_CON1.3
IO15  (via drill 0.8)
  Top 0.61: v13.97,12.7 13.97,8.89 16.51,6.35 29.21,6.35 30.48,5.08 IOM_CON1.2
  Bottom 0.61: IO2_CON1.3 v13.97,12.7
IO16  (via drill 0.8)
  Top 0.61: IOM_CON1.1 v15.24,3.81
  Bottom 0.61: IO1_CON1.3 6.35,11.43 7.62,10.16 10.16,10.16 10.79,9.52 10.79,5.08 12.07,3.81 v15.24,3.81
IO17  (via drill 0.8)
  Top 0.61: IOM_CON1.9 69.85,3.81 71.12,5.08 v71.12,12.7
  Bottom 0.61: v71.12,12.7 IO9_CON1.3
IO18  (via drill 0.8)
  Top 0.61: IOM_CON2.8 45.72,87.63 46.99,88.9 62.23,88.9 63.5,90.17 v63.5,93.98
  Bottom 0.61: v63.5,93.98 IO8_CON2.3
IO19  (via drill 0.8)
  Top 0.61: IOM_CON2.7 43.18,88.9 44.45,90.17 54.61,90.17 55.88,91.44 v55.88,93.98
  Bottom 0.61: v55.88,93.98 IO7_CON2.3
IO20  (via drill 0.8)
  Top 0.61: IOM_CON2.6 40.64,91.44 43.18,93.98 v48.26,93.98
  Bottom 0.61: v48.26,93.98 IO6_CON2.3
IO21  (via drill 0.8)
  Top 0.61: v38.1,93.98 IOM_CON2.5
  Bottom 0.61: v38.1,93.98 IO5_CON2.3
IO22  (via drill 0.8)
  Top 0.61: v29.21,93.98 31.75,91.44 34.29,91.44 35.56,90.17 IOM_CON2.4
  Bottom 0.61: v29.21,93.98 IO4_CON2.3
IO23  (via drill 0.8)
  Top 0.61: IOM_CON2.3 33.02,87.63 31.75,88.9 24.13,88.9 21.59,91.44 v21.59,93.98
  Bottom 0.61: v21.59,93.98 IO3_CON2.3
IO24  (via drill 0.8)
  Top 0.61: v13.97,93.98 13.97,90.17 16.51,87.63 29.21,87.63 30.48,86.36 IOM_CON2.2
  Bottom 0.61: IO2_CON2.3 v13.97,93.98
IO25  (via drill 0.8)
  Top 0.61: IOM_CON2.1 v15.24,85.09
  Bottom 0.61: IO1_CON2.3 6.35,92.71 7.62,91.44 10.16,91.44 10.79,90.81 10.79,86.36 12.07,85.09 v15.24,85.09
IO26  (via drill 0.8)
  Top 0.61: IOM_CON2.9 69.85,85.09 71.12,86.36 v71.12,93.98
  Bottom 0.61: v71.12,93.98 IO9_CON2.3
IO27  (via drill 0.8)
  Top 0.61: v118.11,54.61 IO8_CON3.3
  Bottom 0.61: IOM_CON3.8 135.89,48.26 134.62,49.53 119.38,49.53 118.11,50.8 v118.11,54.61
IO28  (via drill 0.8)
  Top 0.61: v125.73,54.61 IO7_CON3.3
  Bottom 0.61: IOM_CON3.7 138.43,49.53 137.16,50.8 127,50.8 125.73,52.07 v125.73,54.61
IO29  (via drill 0.8)
  Top 0.61: v133.35,54.61 IO6_CON3.3
  Bottom 0.61: IOM_CON3.6 140.97,52.07 138.43,54.61 v133.35,54.61
IO30  (via drill 0.8)
  Top 0.61: v143.51,54.61 IO5_CON3.3
  Bottom 0.61: v143.51,54.61 IOM_CON3.5
IO31  (via drill 0.8)
  Top 0.61: v152.4,54.61 IO4_CON3.3
  Bottom 0.61: v152.4,54.61 149.86,52.07 147.32,52.07 146.05,50.8 IOM_CON3.4
IO32  (via drill 0.8)
  Top 0.61: v160.02,54.61 IO3_CON3.3
  Bottom 0.61: IOM_CON3.3 148.59,48.26 149.86,49.53 157.48,49.53 160.02,52.07 v160.02,54.61
IO33  (via drill 0.8)
  Top 0.61: IO2_CON3.3 v167.64,54.61
  Bottom 0.61: v167.64,54.61 167.64,50.8 165.1,48.26 152.4,48.26 151.13,46.99 IOM_CON3.2
IO34  (via drill 0.8)
  Top 0.61: IO1_CON3.3 175.26,53.34 173.99,52.07 171.45,52.07 170.81,51.43 170.81,46.99 169.55,45.72 v166.37,45.72
  Bottom 0.61: IOM_CON3.1 v166.37,45.72
IO35  (via drill 0.8)
  Top 0.61: v110.49,54.61 IO9_CON3.3
  Bottom 0.61: IOM_CON3.9 111.76,45.72 110.49,46.99 v110.49,54.61
IO36  (via drill 0.8)
  Top 0.61: v118.11,12.7 IO8_CON4.3
  Bottom 0.61: IOM_CON4.8 135.89,6.35 134.62,7.62 119.38,7.62 118.11,8.89 v118.11,12.7
IO37  (via drill 0.8)
  Top 0.61: v125.73,12.7 IO7_CON4.3
  Bottom 0.61: IOM_CON4.7 138.43,7.62 137.16,8.89 127,8.89 125.73,10.16 v125.73,12.7
IO38  (via drill 0.8)
  Top 0.61: v133.35,12.7 IO6_CON4.3
  Bottom 0.61: IOM_CON4.6 140.97,10.16 138.43,12.7 v133.35,12.7
IO39  (via drill 0.8)
  Top 0.61: v143.51,12.7 IO5_CON4.3
  Bottom 0.61: v143.51,12.7 IOM_CON4.5
IO40  (via drill 0.8)
  Top 0.61: v152.4,12.7 IO4_CON4.3
  Bottom 0.61: v152.4,12.7 149.86,10.16 147.32,10.16 146.05,8.89 IOM_CON4.4
IO41  (via drill 0.8)
  Top 0.61: v160.02,12.7 IO3_CON4.3
  Bottom 0.61: IOM_CON4.3 148.59,6.35 149.86,7.62 157.48,7.62 160.02,10.16 v160.02,12.7
IO42  (via drill 0.8)
  Top 0.61: IO2_CON4.3 v167.64,12.7
  Bottom 0.61: v167.64,12.7 167.64,8.89 165.1,6.35 152.4,6.35 151.13,5.08 IOM_CON4.2
IO43  (via drill 0.8)
  Top 0.61: IO1_CON4.3 175.26,11.43 173.99,10.16 171.45,10.16 170.81,9.52 170.81,5.08 169.55,3.81 v166.37,3.81
  Bottom 0.61: IOM_CON4.1 v166.37,3.81
IO44  (via drill 0.8)
  Top 0.61: v110.49,12.7 IO9_CON4.3
  Bottom 0.61: IOM_CON4.9 111.76,3.81 110.49,5.08 v110.49,12.7
IO45  (via drill 0.8)
  Top 0.61: v118.11,93.98 IO8_CON5.3
  Bottom 0.61: IOM_CON5.8 135.89,87.63 134.62,88.9 119.38,88.9 118.11,90.17 v118.11,93.98
IO46  (via drill 0.8)
  Top 0.61: v125.73,93.98 IO7_CON5.3
  Bottom 0.61: IOM_CON5.7 138.43,88.9 137.16,90.17 127,90.17 125.73,91.44 v125.73,93.98
IO47  (via drill 0.8)
  Top 0.61: v133.35,93.98 IO6_CON5.3
  Bottom 0.61: IOM_CON5.6 140.97,91.44 138.43,93.98 v133.35,93.98
IO48  (via drill 0.8)
  Top 0.61: v143.51,93.98 IO5_CON5.3
  Bottom 0.61: v143.51,93.98 IOM_CON5.5
IO49  (via drill 0.8)
  Top 0.61: v152.4,93.98 IO4_CON5.3
  Bottom 0.61: v152.4,93.98 149.86,91.44 147.32,91.44 146.05,90.17 IOM_CON5.4
IO50  (via drill 0.8)
  Top 0.61: v160.02,93.98 IO3_CON5.3
  Bottom 0.61: IOM_CON5.3 148.59,87.63 149.86,88.9 157.48,88.9 160.02,91.44 v160.02,93.98
IO51  (via drill 0.8)
  Top 0.61: IO2_CON5.3 v167.64,93.98
  Bottom 0.61: v167.64,93.98 167.64,90.17 165.1,87.63 152.4,87.63 151.13,86.36 IOM_CON5.2
IO52  (via drill 0.8)
  Top 0.61: IO1_CON5.3 175.26,92.71 173.99,91.44 171.45,91.44 170.81,90.81 170.81,86.36 169.55,85.09 v166.37,85.09
  Bottom 0.61: IOM_CON5.1 v166.37,85.09
IO53  (via drill 0.8)
  Top 0.61: v110.49,93.98 IO9_CON5.3
  Bottom 0.61: IOM_CON5.9 111.76,85.09 110.49,86.36 v110.49,93.98
IO54  (via drill 0.8)
  Top 0.61: IOM_CON6.8 45.72,124.46 46.99,125.73 62.23,125.73 63.5,127 v63.5,130.81
  Bottom 0.61: v63.5,130.81 IO8_CON6.3
IO55  (via drill 0.8)
  Top 0.61: IOM_CON6.7 43.18,125.73 44.45,127 54.61,127 55.88,128.27 v55.88,130.81
  Bottom 0.61: v55.88,130.81 IO7_CON6.3
IO56  (via drill 0.8)
  Top 0.61: IOM_CON6.6 40.64,128.27 43.18,130.81 v48.26,130.81
  Bottom 0.61: v48.26,130.81 IO6_CON6.3
IO57  (via drill 0.8)
  Top 0.61: v38.1,130.81 IOM_CON6.5
  Bottom 0.61: v38.1,130.81 IO5_CON6.3
IO58  (via drill 0.8)
  Top 0.61: v29.21,130.81 31.75,128.27 34.29,128.27 35.56,127 IOM_CON6.4
  Bottom 0.61: v29.21,130.81 IO4_CON6.3
IO59  (via drill 0.8)
  Top 0.61: IOM_CON6.3 33.02,124.46 31.75,125.73 24.13,125.73 21.59,128.27 v21.59,130.81
  Bottom 0.61: v21.59,130.81 IO3_CON6.3
IO60  (via drill 0.8)
  Top 0.61: v13.97,130.81 13.97,127 16.51,124.46 29.21,124.46 30.48,123.19 IOM_CON6.2
  Bottom 0.61: IO2_CON6.3 v13.97,130.81
IO61  (via drill 0.8)
  Top 0.61: IOM_CON6.1 v15.24,121.92
  Bottom 0.61: IO1_CON6.3 6.35,129.54 7.62,128.27 10.16,128.27 10.79,127.63 10.79,123.19 12.07,121.92 v15.24,121.92
IO62  (via drill 0.8)
  Top 0.61: IOM_CON6.9 69.85,121.92 71.12,123.19 v71.12,130.81
  Bottom 0.61: v71.12,130.81 IO9_CON6.3
IO63  (via drill 0.8)
  Top 0.61: v118.11,130.81 IO8_CON7.3
  Bottom 0.61: IOM_CON7.8 135.89,124.46 134.62,125.73 119.38,125.73 118.11,127 v118.11,130.81
IO64  (via drill 0.8)
  Top 0.61: v125.73,130.81 IO7_CON7.3
  Bottom 0.61: IOM_CON7.7 138.43,125.73 137.16,127 127,127 125.73,128.27 v125.73,130.81
IO65  (via drill 0.8)
  Top 0.61: v133.35,130.81 IO6_CON7.3
  Bottom 0.61: IOM_CON7.6 140.97,128.27 138.43,130.81 v133.35,130.81
IO66  (via drill 0.8)
  Top 0.61: v143.51,130.81 IO5_CON7.3
  Bottom 0.61: v143.51,130.81 IOM_CON7.5
IO67  (via drill 0.8)
  Top 0.61: v152.4,130.81 IO4_CON7.3
  Bottom 0.61: v152.4,130.81 149.86,128.27 147.32,128.27 146.05,127 IOM_CON7.4
IO68  (via drill 0.8)
  Top 0.61: v160.02,130.81 IO3_CON7.3
  Bottom 0.61: IOM_CON7.3 148.59,124.46 149.86,125.73 157.48,125.73 160.02,128.27 v160.02,130.81
IO69  (via drill 0.8)
  Top 0.61: IO2_CON7.3 v167.64,130.81
  Bottom 0.61: v167.64,130.81 167.64,127 165.1,124.46 152.4,124.46 151.13,123.19 IOM_CON7.2
IO70  (via drill 0.8)
  Top 0.61: IO1_CON7.3 175.26,129.54 173.99,128.27 171.45,128.27 170.81,127.63 170.81,123.19 169.55,121.92 v166.37,121.92
  Bottom 0.61: IOM_CON7.1 v166.37,121.92
IO71  (via drill 0.8)
  Top 0.61: v110.49,130.81 IO9_CON7.3
  Bottom 0.61: IOM_CON7.9 111.76,121.92 110.49,123.19 v110.49,130.81
N$1  (via drill 0.8)
  other vias: 1.27,66.04
N$2  (via drill 0.8)
  other vias: 73.66,66.04
N$3  (via drill 0.8)
  other vias: 73.66,43.18
N$4  (via drill 0.8)
  other vias: 1.27,43.18
N$5  (via drill 0.8)
  other vias: 1.27,24.13
N$6  (via drill 0.8)
  other vias: 73.66,24.13
N$7  (via drill 0.8)
  other vias: 73.66,1.27
N$8  (via drill 0.8)
  other vias: 1.27,1.27
N$9  (via drill 0.8)
  other vias: 1.27,105.41
N$10  (via drill 0.8)
  other vias: 73.66,105.41
N$11  (via drill 0.8)
  other vias: 73.66,82.55
N$12  (via drill 0.8)
  other vias: 1.27,82.55
N$13  (via drill 0.8)
  other vias: 180.34,66.04
N$14  (via drill 0.8)
  other vias: 107.95,66.04
N$15  (via drill 0.8)
  other vias: 107.95,43.18
N$16  (via drill 0.8)
  other vias: 180.34,43.18
N$17  (via drill 0.8)
  other vias: 180.34,24.13
N$18  (via drill 0.8)
  other vias: 107.95,24.13
N$19  (via drill 0.8)
  other vias: 107.95,1.27
N$20  (via drill 0.8)
  other vias: 180.34,1.27
N$21  (via drill 0.8)
  other vias: 180.34,105.41
N$22  (via drill 0.8)
  other vias: 107.95,105.41
N$23  (via drill 0.8)
  other vias: 107.95,82.55
N$24  (via drill 0.8)
  other vias: 180.34,82.55
N$25  (via drill 0.8)
  other vias: 1.27,142.24
N$26  (via drill 0.8)
  other vias: 73.66,142.24
N$27  (via drill 0.8)
  other vias: 73.66,119.38
N$28  (via drill 0.8)
  other vias: 1.27,119.38
N$29  (via drill 0.8)
  other vias: 180.34,142.24
N$30  (via drill 0.8)
  other vias: 107.95,142.24
N$31  (via drill 0.8)
  other vias: 107.95,119.38
N$32  (via drill 0.8)
  other vias: 180.34,119.38
(copper drawn outside any net)
  shapes: Top area x16